# Altium PCB OptoGrid_Battery_V0.05.pcbdoc
Units mil, origin at the board's own origin, x right, y up, seen from the top; angles counter-clockwise.
Board outline 1027.08 x 1092.32 mil, 2 copper layers (Top Layer, Bottom Layer); 15 components, 10 nets, 65 pads, 10 vias.
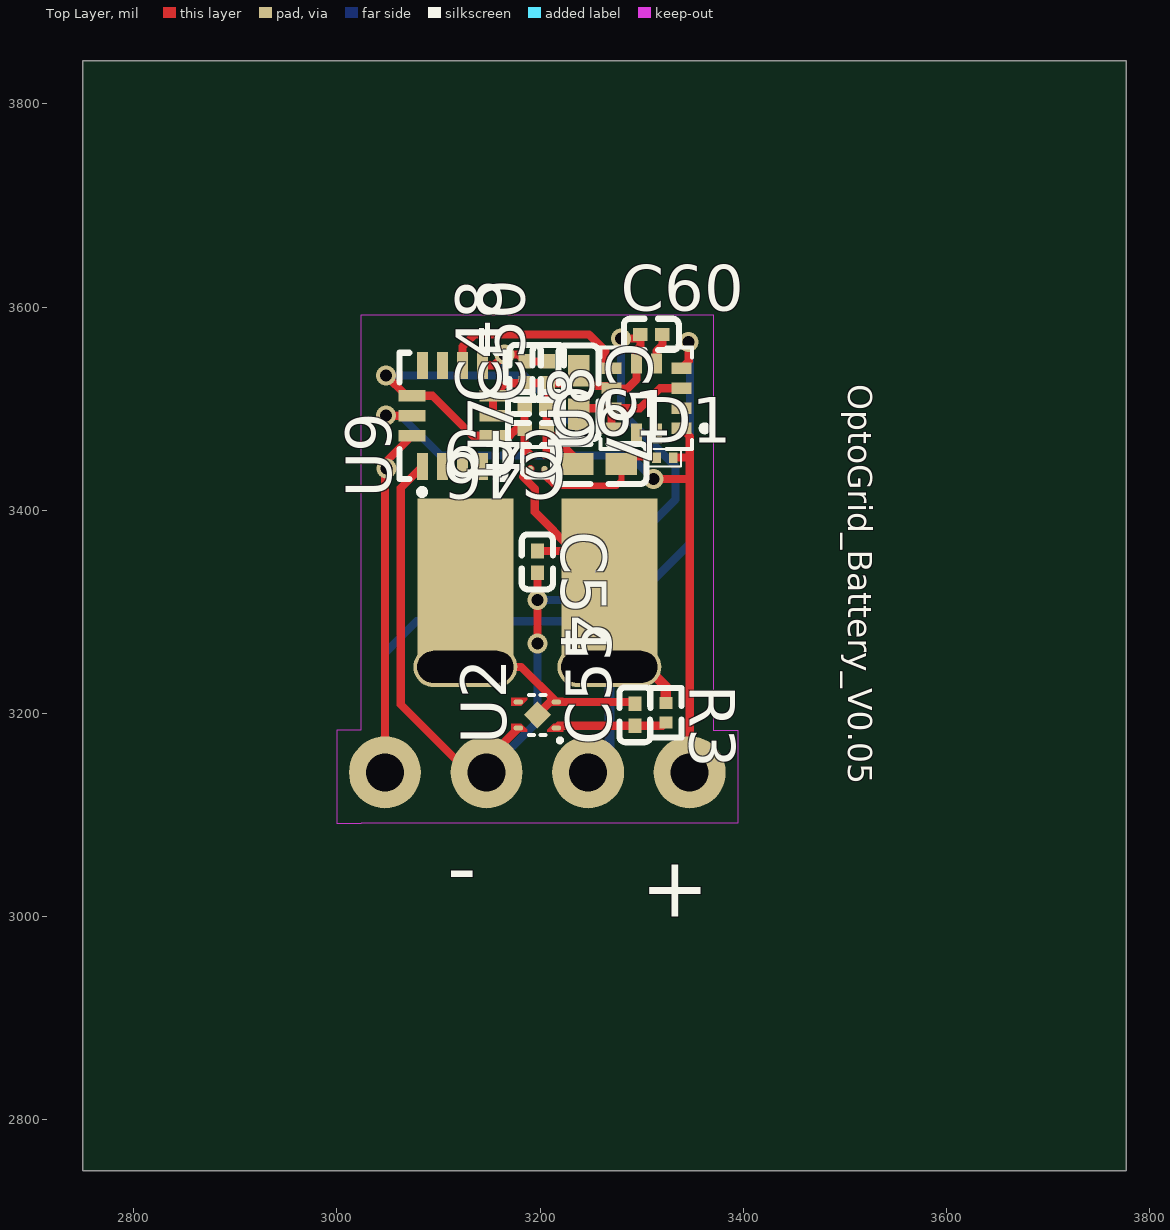
[diagram p0: Top Layer view]
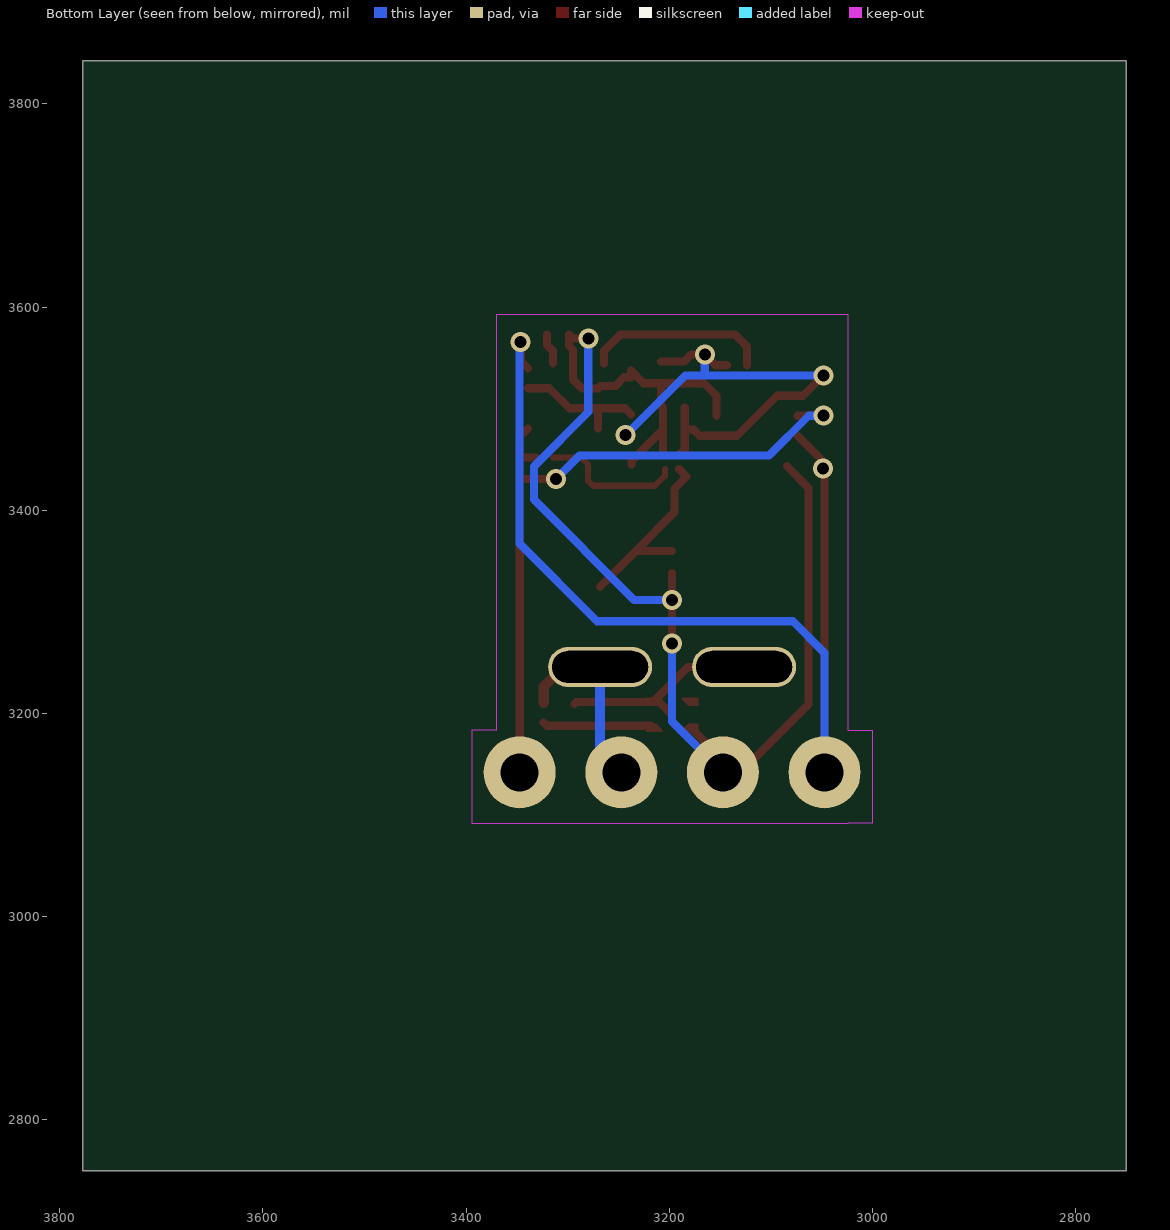
[diagram p1: Bottom Layer view, seen from below]

## Layer stack, top to bottom
Top Layer: signal copper (thickness not stored)
Dielectric: dielectric 12.6, FR-4, Dk 4.8
Bottom Layer: signal copper (thickness not stored)

## Board outline
3777.08,2750 2750,2750 2750,3842.32 3777.08,3842.32

## Design rules (kind name [scope] priority, off if disabled: settings)
BoardOutlineClearance copperThickness1oz [All] p0: genericclearance=10 ignorepadtopadclearanceinfootprint=FALSE except(0: Arc-SplitContinuation Track-SplitContinuation SMDPad-SplitContinuation THPad-SplitContinuation Via-SplitContinuation Fill-SplitContinuation Poly-SplitContinuation Region-SplitContinuation Text-SplitContinuation; 6: Track-CutoutEdge SMDPad-CutoutEdge THPad-CutoutEdge Via-CutoutEdge Region-CutoutEdge; 11.8: Track-OutlineEdge SMDPad-OutlineEdge THPad-OutlineEdge Via-OutlineEdge Fill-OutlineEdge Region-OutlineEdge Poly-OutlineEdge Text-OutlineEdge Fill-CutoutEdge)
BoardOutlineClearance copperThickness2oz [All] p0: genericclearance=10 ignorepadtopadclearanceinfootprint=FALSE except(0: Arc-SplitContinuation Track-SplitContinuation SMDPad-SplitContinuation THPad-SplitContinuation Via-SplitContinuation Fill-SplitContinuation Poly-SplitContinuation Region-SplitContinuation Text-SplitContinuation; 6: Track-CutoutEdge SMDPad-CutoutEdge THPad-CutoutEdge Via-CutoutEdge Region-CutoutEdge; 11.8: Track-OutlineEdge SMDPad-OutlineEdge THPad-OutlineEdge Via-OutlineEdge Fill-OutlineEdge Region-OutlineEdge Poly-OutlineEdge Text-OutlineEdge Fill-CutoutEdge)
Clearance copperThickness1oz [(InNet('GND') OR InNet('BAT+') OR InNet('VCC') OR InNet('BAT-') OR InNet('$1N2753') OR InNet('$1N1923') OR InNet('SDA') OR InNet('SCL') OR InNet('$1N3706') OR InNet('SYNC'))] p1: gap=7 ignorepadtopadclearanceinfootprint=FALSE except(4: Track-Track; 6: Track-SMDPad SMDPad-SMDPad Track-THPad SMDPad-THPad THPad-THPad Track-Via SMDPad-Via THPad-Via Via-Via SMDPad-Fill THPad-Fill Via-Fill Fill-Fill Track-Region SMDPad-Region THPad-Region Via-Region Region-Region Track-Poly SMDPad-Poly THPad-Poly Via-Poly Fill-Poly Region-Poly Poly-Poly Track-Text SMDPad-Text THPad-Text Via-Text Fill-Text Region-Text Poly-Text Text-Text; 6.9: Track-Hole SMDPad-Hole THPad-Hole Via-Hole Fill-Hole Region-Hole Poly-Hole Text-Hole Sheet-Hole; 11.8: Track-Fill Fill-Region Track-Sheet SMDPad-Sheet THPad-Sheet Via-Sheet Fill-Sheet Region-Sheet Poly-Sheet Text-Sheet)
Clearance copperThickness2oz [All] p1: gap=7 ignorepadtopadclearanceinfootprint=FALSE except(6: Track-SMDPad SMDPad-SMDPad Track-THPad SMDPad-THPad THPad-THPad Track-Via SMDPad-Via THPad-Via Via-Via SMDPad-Fill THPad-Fill Via-Fill Fill-Fill Track-Region SMDPad-Region THPad-Region Via-Region Region-Region Track-Poly SMDPad-Poly THPad-Poly Via-Poly Fill-Poly Region-Poly Poly-Poly Track-Text SMDPad-Text THPad-Text Via-Text Fill-Text Region-Text Poly-Text Text-Text; 6.9: Track-Hole SMDPad-Hole THPad-Hole Via-Hole Fill-Hole Region-Hole Poly-Hole Text-Hole Sheet-Hole; 8: Track-Track; 11.8: Track-Fill Fill-Region Track-Sheet SMDPad-Sheet THPad-Sheet Via-Sheet Fill-Sheet Region-Sheet Poly-Sheet Text-Sheet)
DiffPairsRouting differentialPair [All] p1: maxuncoupledlength=10 minlimit=5.9843 maxlimit=5.9843 mostfreqgap=5.9843 toplayer_minwidth=5 toplayer_prefwidth=10 toplayer_maxwidth=100 bottomlayer_minwidth=5 bottomlayer_prefwidth=10 bottomlayer_maxwidth=100
PasteMaskExpansion pasteMaskExpansion [All] p1: expansion=0
PlaneConnect innerPlane [All] p1: planeconnectstyle=Relief reliefexpansion=20 reliefentries=4 reliefconductorwidth=10 reliefairgap=10
PolygonConnect copperRegion [All] p1: connectstyle=Relief reliefentries=4 reliefconductorwidth=10 polygonreliefangle="90 Angle" airgapwidth=10
RoutingVias viaSize [All] p1: viastyle="Through Hole" holewidth=12.0078 minholewidth=11.811 maxholewidth=248.0316 width=24.0158 minwidth=19.685 maxwidth=393.7008
SolderMaskExpansion solderMaskExpansion [All] p1: useseparateexpansions=TRUE expansion=2.0079 expansionbottom=2.0079
Width copperThickness1oz [All] p1: maxlimit=100 minlimit=4 preferedwidth=8
Width copperThickness2oz [All] p1: maxlimit=100 minlimit=8 preferedwidth=10

## Components (designator, comment, footprint, x,y, rotation, side; value= is the part's Value field where it differs from the comment)
C46 "GRM033R61A225KE47D" C0201 3195.53,3479.49 r180 top
C48 "GRM033R61A225KE47D" C0201 3185.23,3535.89 r90 top
C49 "GRM033R71A103KA01D" C0201 3195.53,3501.19 r180 top
C50 "GRM033Z71A104KE14D" C0201 3208.03,3535.89 r90 top
C54 "GRM033R61A225KE47D" C0201 3197.23,3349.29 r270 top
C55 "GRM033R61E104KE14D" C0201 3293.33,3198.79 r90 top
C57 "CL05A106MP5NUNC" C0402 3237.83,3516.09 r270 top
C60 "GRM033R61E224KE01D" C0201 3309.43,3573.19 r0 top
C61 "GRM155Z71A225KE01D" C0402 3258.53,3445.59 r0 top
D1 "BAT30F4" DFN0603-D_L0.6-W0.3-P0.34-RD 3322.63,3451.89 r0 top
R3 "RC0201FR-07510RL" R0201 3323.63,3200.79 r270 top
U2 "DS6101AED4" DFN-4_L1.0-W1.0-P0.65-BL-EP 3197.23,3198.59 r90 top
U7 "NCP163AFCT330T2G" WLCSP-4_L0.6-W0.6-P0.35-R2-C2-TL 3197.33,3447.49 r90 top
U8 "LIS2MDLTR" LGA-12_L2.0-W2.0-P0.50-BL 3304.53,3510.29 r90 top
U9 "IIM-42652" LGA-14_L3.0-W2.5-P0.50-TL 3113.73,3493.09 r90 top

## Footprints (in the part's own frame and the unit in brackets; to place one, negate y for a bottom-side part, rotate by r counter-clockwise, add the part's x,y. Pads: shape width x height; smd on the part's side, far side on the other; paste and mask are expansions set on the pad)
C0201 [mil]
  rect 14.51x12.76 smd: 1(-10.8,0) 2(10.8,0)
  silkscreen extent -27,-15 27,15
C0402 [mm]
  rect 0.79x0.54 smd: 1(-0.545,0) 2(0.545,0)
  silkscreen extent -1.17,-0.5 1.17,0.5
DFN0603-D_L0.6-W0.3-P0.34-RD [mm]
  rect 0.22x0.26 smd: 1(-0.21,0) 2(0.21,0)
  silkscreen extent -0.49,-0.22 0.41,0.22
DFN-4_L1.0-W1.0-P0.65-BL-EP [mm]
  oval 0.12x0.24 smd: 1(-0.325,-0.475) 2(0.325,-0.474) 3(0.325,0.475) 4(-0.325,0.475)
  rect 0.48x0.48 smd rot 45: 5(0.004,0.001)
  Top Layer region: 0.425,-0.649 0.225,-0.649 0.225,-0.399 0.225,-0.399 0.375,-0.249 0.425,-0.249
  Top Layer region: -0.225,-0.4 -0.225,-0.65 -0.425,-0.65 -0.425,-0.25 -0.375,-0.25
  Top Layer region: -0.425,0.651 -0.225,0.651 -0.225,0.401 -0.225,0.401 -0.375,0.251 -0.425,0.251
  Top Layer region: 0.425,0.651 0.225,0.651 0.225,0.401 0.225,0.401 0.375,0.251 0.425,0.251
  silkscreen extent -0.68,-0.61 0.5,0.21
LGA-12_L2.0-W2.0-P0.50-BL [mm]
  rect 0.28x0.5 smd: 1(-0.75,-0.875) 2(-0.25,-0.875) 3(0.25,-0.875) 4(0.75,-0.875) 7(0.75,0.875) 8(0.25,0.875) 9(-0.25,0.875) 10(-0.75,0.875)
  rect 0.5x0.28 smd: 5(0.875,-0.25) 6(0.875,0.25) 11(-0.875,0.25) 12(-0.875,-0.25)
  silkscreen extent -1.27,-1.53 1.27,1.14
LGA-14_L3.0-W2.5-P0.50-TL [mm]
  rect 0.675x0.28 smd: 1(-1.262,0.75) 2(-1.262,0.25) 3(-1.262,-0.25) 4(-1.262,-0.75) 8(1.262,-0.75) 9(1.262,-0.25) 10(1.262,0.25) 11(1.262,0.75)
  rect 0.28x0.675 smd: 5(-0.5,-1.012) 6(0,-1.012) 7(0.5,-1.012) 12(0.5,1.012) 13(0,1.012) 14(-0.5,1.012)
  silkscreen extent -1.98,-1.33 1.58,1.33
R0201 [mil]
  rect 11.93x12.76 smd: 1(-9.51,0) 2(9.51,0)
  silkscreen extent -24,-15 24,15
WLCSP-4_L0.6-W0.6-P0.35-R2-C2-TL [mm]
  round 0.158 smd: A1(-0.175,0.175) A2(0.175,0.175) B1(-0.175,-0.175) B2(0.175,-0.175)
  silkscreen extent -0.38,-0.38 0.38,0.38

## Free pads (board coordinates)
  oval 102.36x39.37 hole 31.5 slot 94.49 at 0 deg: 1(3126.36,3245.87) 1(3268.09,3245.87)
  rect 94.49x173.23 smd: 1(3126.36,3324.84) 1(3268.09,3324.84)
  round 70.87 hole 37.4: 1(3247.23,3142.17) 2(3047.23,3142.17) 2(3147.23,3142.17) 2(3347.23,3142.17)

## Via types
v1: diameter 19.68, hole 11.81, Top Layer to Bottom Layer, 10 vias

## Nets (pads, with @x,y where several pads share a name; then routed paths per layer and width w, separated by ;. In a path a pad name is that pad's centre, name@x,y a point inside that pad or via, vN(x,y) a via of type N, cw(c..) or ccw(c..) an arc to the next point about the centre after c; other vN are vias at no path point)
$1N1923: C60.2 U8.5 | length 30.9
  Top Layer w7.99: U8.5 3314.37,3556.73 3320.23,3562.59 C60.2
$1N2753: C55.1 R3.2 U2.1 | length 110
  Top Layer w8: U2.1 3218.14,3187.99 C55.1 3320.34,3187.99 R3.2
$1N3706: C61.2 D1.1 U7.B1 | length 141.3
  Top Layer w6: U7.B1 3204.22,3434.1 3214.13,3424.19 3275.03,3424.19 3279.99,3429.15 C61.2@3279.99,3445.09 ; C61.2 3286.29,3451.89 D1.1
BAT+: C54.1 pad.1@3247.23,3142.17 pad.1@3268.09,3245.87 pad.1@3268.09,3324.84 R3.1 U7.A1 | length 381.9
  Top Layer w7.99: U7.A1 3182.93,3433.09 3194.73,3421.29 3194.73,3398.21 pad.1@3232.84,3360.09 ; C54.1@3197.33,3360.09 pad.1@3232.84,3360.09 ; pad.1@3268.09,3324.84 pad.1@3232.84,3360.09
  Top Layer w10: pad.1@3268.09,3245.87 3304.46,3245.87 3323.63,3226.69 R3.1
  Bottom Layer w10: pad.1@3247.23,3142.17 3268.09,3163.04 pad.1@3268.09,3245.87
BAT-: C55.2 pad.1@3126.36,3245.87 pad.1@3126.36,3324.84 U2.2 U2.5 | length 205.9
  Top Layer w8: pad.1@3126.36,3245.87 3181.43,3245.87 U2.2 ; U2.5 3209.83,3211.39 U2.2 ; C55.2 3291.53,3211.39 U2.2
GND: C46.1 C48.1 C49.1 C50.1 C54.2 C57.1 C60.1 C61.1 pad.2@3147.23,3142.17 U2.4 U7.B2 U8.6 U8.8 U9.1 U9.6 U9.7 | length 1358.3
  Top Layer w7.99: U9.1 3062.83,3422.04 3062.83,3209.09 3129.75,3142.17 pad.2@3147.23,3142.17 ; U9.6 U9.7 3165.9,3525.09 C48.1 C50.1 ; v1(3197.23,3268.91) v1(3197.23,3311.89) C54.2 ; U7.B2 3206.33,3456.49 C46.1 ; C61.1@3237.07,3445.09 3237.07,3448.75 C46.1 ; v1(3279.73,3569.33) 3294.76,3569.33 C60.1 3298.63,3561.99 3294.73,3558.09 ; 3294.69,3558.05 U8.6 3294.69,3528.75 3286.07,3520.13 U8.8 3267.74,3522.48 3252.88,3522.5 3244.39,3530.99 3237.83,3531 C57.1 3225.37,3525.09 C50.1 ; C46.1 C49.1 3208.03,3502.89 C50.1
  Top Layer w8: pad.2@3147.23,3142.17 3147.23,3154.52 U2.4
  Bottom Layer w7.99: pad.2@3147.23,3142.17 3197.23,3192.17 v1(3197.23,3268.91) ; v1(3197.23,3311.89) 3234.54,3311.89 3333.28,3410.63 3333.28,3443.11 3279.73,3496.66 v1(3279.73,3569.33)
SCL: D1.2 pad.2@3347.23,3142.17 U8.1 U9.13 | length 708.9
  Top Layer w7.99: v1(3048.25,3493.18) 3073.78,3493.18 U9.13 ; v1(3311.37,3430.95) 3347.15,3430.95 3347.23,3430.87 ; D1.2 3346.97,3451.89 3347.23,3452.15 ; U8.1 3347.23,3472.51 3347.23,3452.15 ; pad.2@3347.23,3142.17 3347.23,3430.87 ; 3347.23,3430.87 3347.23,3452.15
  Bottom Layer w7.99: v1(3048.25,3493.18) 3062.74,3493.18 3101.79,3454.13 3288.18,3454.13 v1(3311.37,3430.95)
SDA: pad.2@3047.23,3142.17 U8.4 U9.14 | length 1032.4
  Top Layer w7.99: pad.2@3047.23,3142.17 3047.23,3439.84 v1(3048.75,3441.37) 3048.75,3448.29 U9.14 ; U8.4 3346.23,3547.07 v1(3346.23,3565.69)
  Bottom Layer w7.99: pad.2@3047.23,3142.17 3047.23,3259.69 3078.42,3290.88 3271.08,3290.88 3347.45,3367.26 3347.45,3564.47 v1(3346.23,3565.69)
SYNC: U8.7 U9.9 | length 183.2
  Top Layer w7.99: U9.9 3123.57,3561.35 3135.38,3573.17 3248.04,3573.17 3264.23,3556.97 U8.7@3264.23,3544.57
VCC: C46.2 C48.2 C49.2 C50.2 C57.2 U7.A2 U8.3 U8.9 U8.10 U9.5 U9.8 U9.12 | length 655.6
  Top Layer w7.99: v1(3048.43,3532.89) 3068.54,3512.78 U9.12 3094.14,3512.78 3133.51,3473.41 U9.5 3170.04,3473.41 3176.13,3479.49 C46.2 ; U9.8 3154.47,3542.78 v1(3165.03,3553.34) 3178.58,3553.34 C48.2 C50.2 ; C49.2 C46.2 ; U7.A2 3184.73,3460.09 C46.2 ; C57.2 3243.65,3500.45 U8.9 ; U8.10 U8.9 ; U8.3@3338.92,3520.19 3318.13,3520.19 3298.39,3500.45 U8.9
  Bottom Layer w7.99: v1(3048.43,3532.89) 3164.88,3532.89 ; v1(3165.03,3553.34) 3165.03,3533.05 3164.88,3532.89 ; v1(3243.23,3473.96) 3184.29,3532.89 3164.88,3532.89
pads on no net: U2.3 U8.2 U8.11 U8.12 U9.2 U9.3 U9.4 U9.10 U9.11

## Keep-outs
Board Outline Layer:
  lines w1: 3024,3092.12 3000,3092.12 3000,3183.41 3024.01,3183.41 3024,3592.32 3370.46,3592.32 3370.46,3183.46 3394.46,3183.46 ; 3024,3092.17 3370.46,3092.17 3394.45,3092.17 ; 3394.55,3092.17 3394.55,3183.46

## Silkscreen, mask and mechanical layers (free items; w line width, h text height)
Top Silkscreen Layer:
  text "OptoGrid_Battery_V0.05" at 3503.46,3524.25 h23.62 r270
  text "-" at 3108.77,3020.2 h59.06
  text "+" at 3299.15,3000 h59.06
Mech6:
  circle w0.39: c3147.23,3142.17 r37.4
  circle w0.39: c3247.23,3142.17 r37.4
  circle w0.39: c3247.23,3142.17 r9.84
  circle w0.39: c3147.23,3142.17 r9.84
  lines w0.39: 3024,3576.42 3024,3092.17 3370.46,3092.17 3370.46,3576.42 ; 3024,3592.32 3370.46,3592.32 ; 3079.12,3253.74 3079.12,3411.22 3173.61,3411.22 3173.61,3253.74 ; 3232.66,3253.74 ccw(c3232.66,3241.93) 3232.66,3230.12 3303.53,3230.12 ccw(c3303.53,3241.93) 3303.53,3253.74 ; 3090.93,3230.12 3161.79,3230.12 ccw(c3161.79,3241.93) 3161.79,3253.74 3090.93,3253.74 ccw(c3090.93,3241.93) 3090.93,3230.12 ; 3220.85,3253.74 3220.85,3411.22 3315.34,3411.22 3315.34,3253.74 3220.85,3253.74